# Altium PCB Nrf52Feather.PcbDoc
Units mm, origin at the board's own origin, x right, y up, seen from the top; angles counter-clockwise.
Board outline 23.03 x 50.97 mm, 2 copper layers (Top Layer, Bottom Layer); 42 components, 42 nets, 209 pads, 68 vias.
Unrouted connection lines stored in the file: 3.
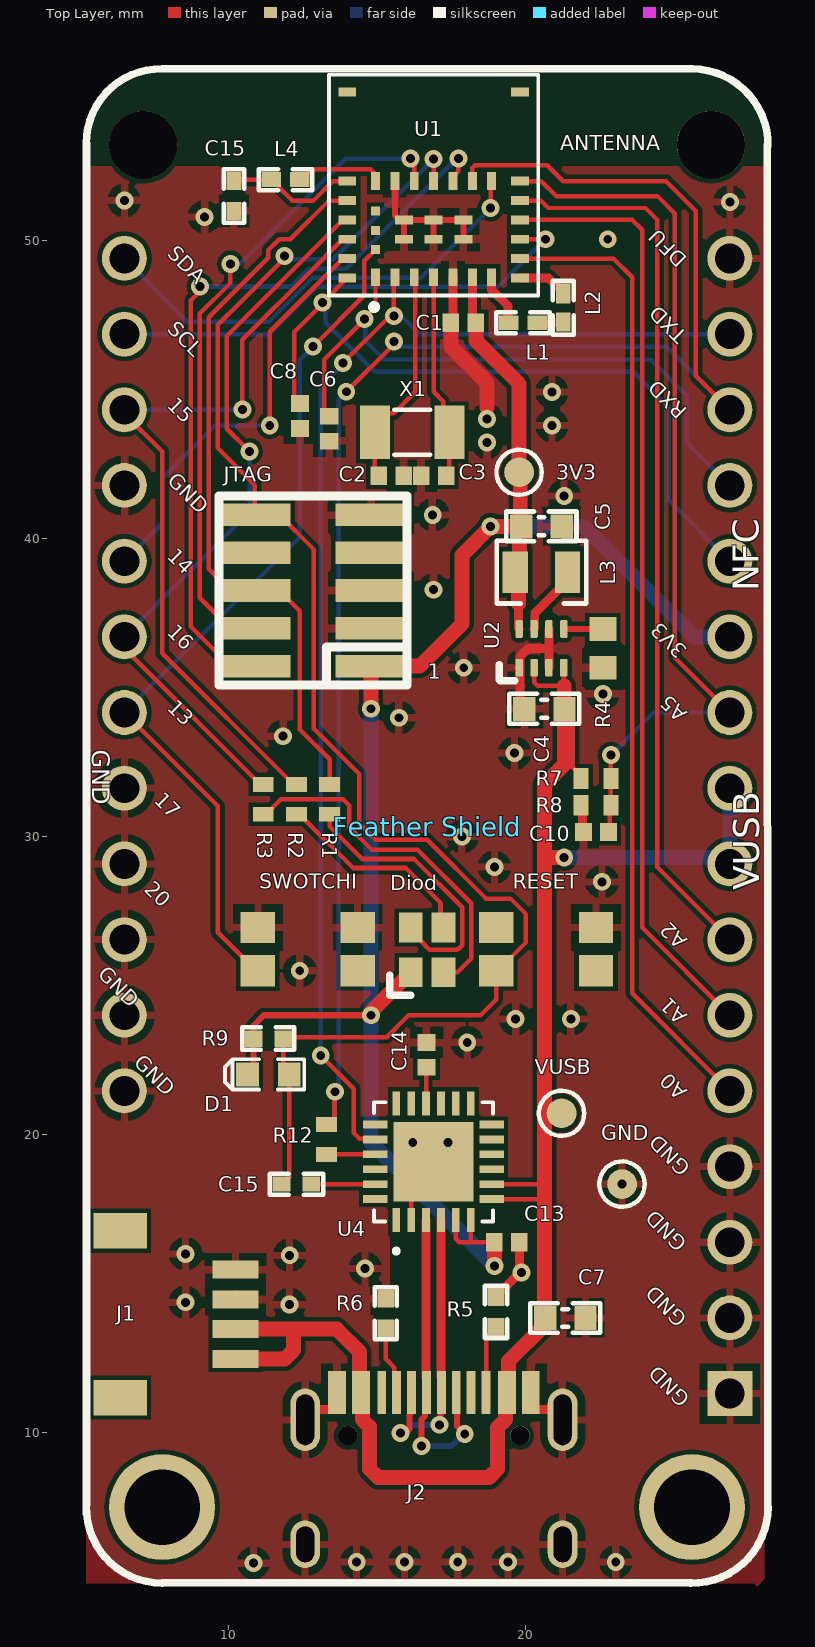
[diagram p0: Top Layer view]
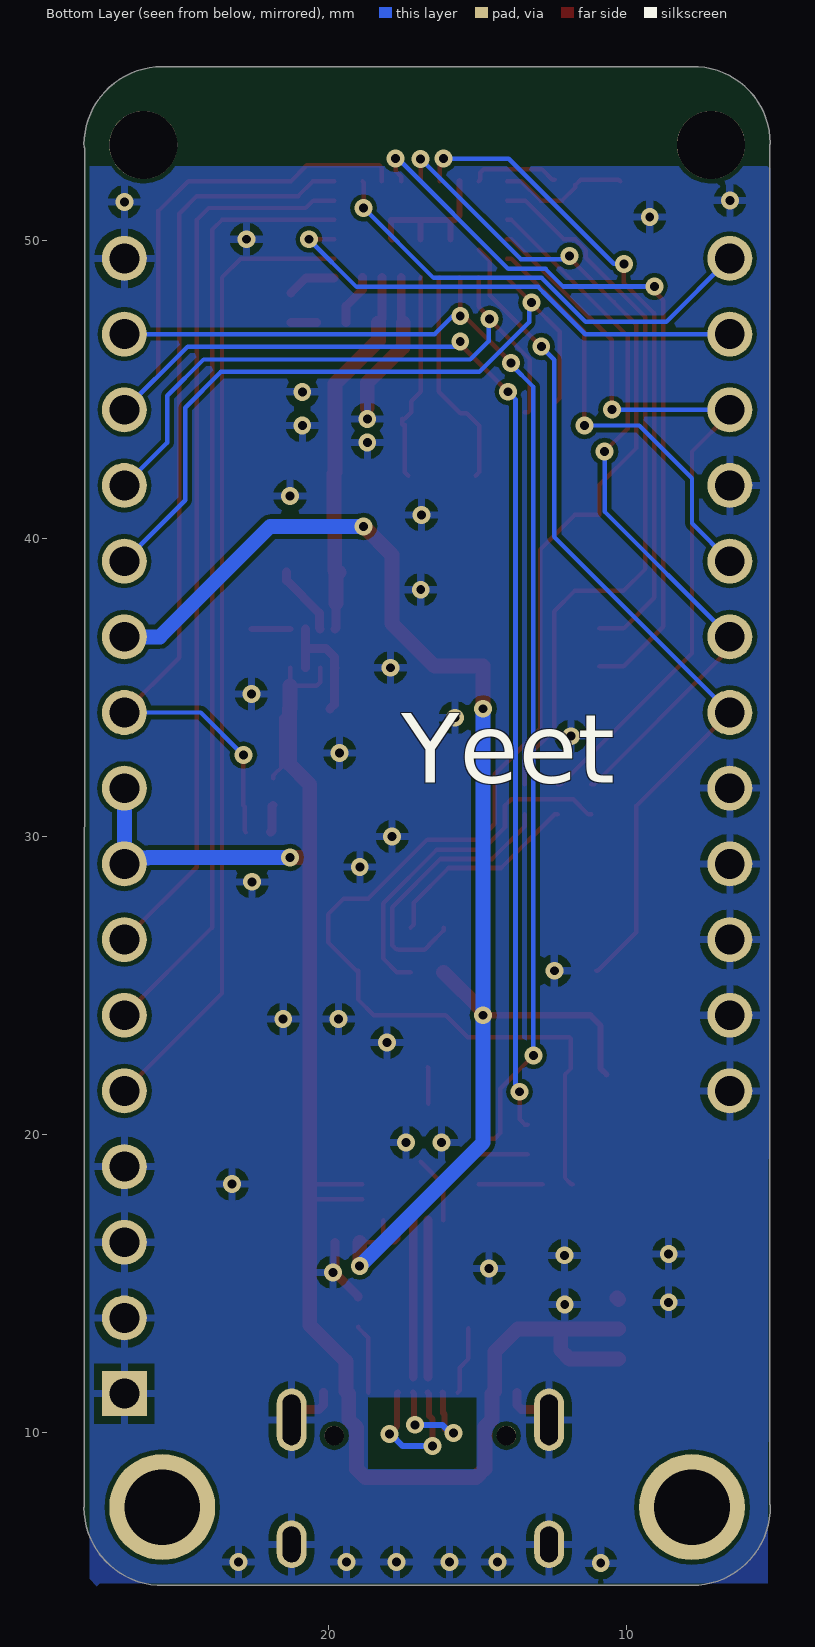
[diagram p1: Bottom Layer view, seen from below]
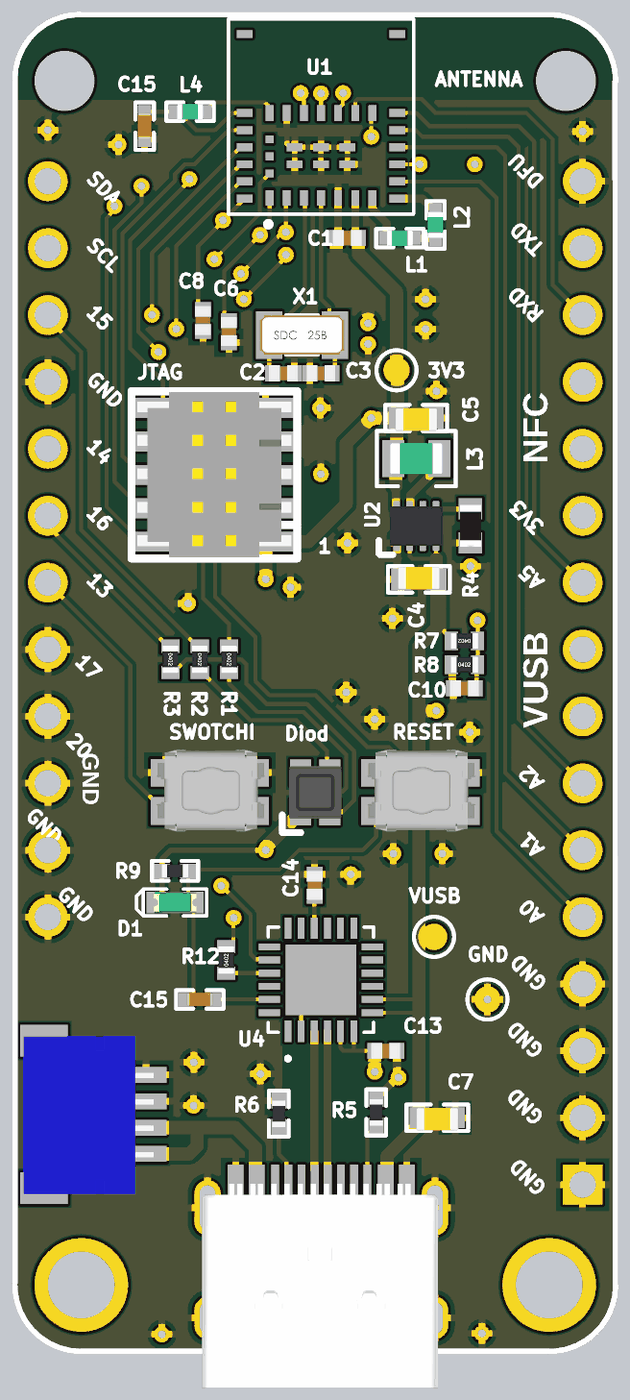
[diagram p2: 3D render of the assembled board from above, using the file's embedded part models]

## Layer stack, top to bottom
Top Solder: solder mask 0.0102, Solder Resist, Dk 3.5
Top Layer: signal copper 0.0356
Dielectric 1: dielectric 0.32, FR-4, Dk 4.8
Bottom Layer: signal copper 0.0356
Bottom Solder: solder mask 0.0102, Solder Resist, Dk 3.5

## Board outline
5.166,7.55 cw(c5.242,7.548) 5.175,7.583 5.175,53.234 cw(c5.242,53.269) 5.166,53.269 cw(c7.741,53.269) 7.793,55.844 cw(c7.791,55.768) 7.8,55.843 25.572,55.843 cw(c25.572,53.217) 28.197,53.217 cw(c25.572,53.217) 28.197,53.165 cw(c28.121,53.166) 28.175,53.114 28.189,7.533 cw(c28.122,7.497) 28.197,7.497 cw(c25.572,7.497) 25.519,4.872 cw(c25.521,4.948) 25.484,4.882 7.83,4.882 cw(c7.792,4.947) 7.792,4.872 cw(c7.792,7.497)

## Design rules (kind name [scope] priority, off if disabled: settings)
Clearance [All] p1: gap=0.15 ignorepadtopadclearanceinfootprint=TRUE
ComponentClearance [All] p1 off: gap=0.254 collisioncheckmode=3 verticalgap=0.254 showdistances=FALSE
DiffPairsRouting [InDifferentialPair('DiffPair')] p1: maxlimit=0.254 minlimit=0.089 mostfreqgap=0.2 toplayer_minwidth=0.089 toplayer_maxwidth=0.381 toplayer_prefwidth=0.15 bottomlayer_minwidth=0.089 bottomlayer_maxwidth=0.381 bottomlayer_prefwidth=0.15 maxuncoupledlength=12.7
MatchedLengths usb [All] p1: tolerance=1 checknetsindiffpair=FALSE checkdiffpairvsdiffpair=TRUE checkxsignals=TRUE checkothers=TRUE
MinimumAnnularRing [All] p1: minimumring=0.125
PolygonConnect [All] p1: connectstyle=Relief reliefconductorwidth=0.254 reliefentries=4 polygonreliefangle="90 Angle" airgapwidth=0.254
RoutingVias [All] p1: holewidth=0.3 width=0.6 viastyle="Through Hole" minholewidth=0.3 minwidth=0.6 maxholewidth=6.3 maxwidth=1.27
SolderMaskExpansion [All] p1: expansion=0.102 istentingtop=FALSE
Width [All] p1: maxlimit=1 minlimit=0.127 preferedwidth=0.2
28 further rules are at their usual default settings.

## Classes and differential pairs
differential pair DiffPair: +USB_P -USB_N

## Components (designator, comment, footprint, x,y, rotation, side; value= is the part's Value field where it differs from the comment)
3V3 "TP" TP_SMD_Ø1.0mm 19.77,42.23 r90 top
C1 "EMK107B7105KA-T" 0402#1 17.9,47.25 r180 top value=1uF
C2 "EMK107B7105KA-T" 0402#1 15.473,42.115 r0 top value=22pF
C3 "EMK107B7105KA-T" 0402#1 16.9,42.115 r180 top value=22pF
C4 "4.7uF" C0603 20.62,34.291 r0 top value=100pF
C5 "10uF" C0603 20.52,40.414 r180 top value=100pF
C6 "EMK107B7105KA-T" 0402#1 13.4,43.695 r270 top value=300pF
C7 "10uF" C0603 21.32,13.847 r180 top value=100pF
C8 "EMK107B7105KA-T" 0402#1 12.414,44.121 r270 top value=300pF
C10 "EMK107B7105KA-T" 0402#1 22.35,30.154 r180 top value=1nF
C13 "EMK107B7105KA-T" 0402#1 19.36,16.387 r0 top value=100nF
C14 "EMK107B7105KA-T" 0402#1 16.66,22.675 r90 top value=10uF
C15 "100nF" C0402 12.295,18.339 r180 top value=100pF
C15 "1pF" C0402 10.2,51.5 r90 top value=100pF
D1 "1N4148" LED_0603_G 11.355,22.02 r0 top value=L0603G
Diod "CLMVC-FKA-CLBDGL7LBB79353" SMOLLLEDCREE 17.231,26.95 r270 top locked
"Feather Shield" "2821" *XCVR_2821 16.682,30.357 r90 top locked
GND "TP" TP_SMD_Ø1.0mm 23.225,18.339 r0 top
J1 "PRT-14417" "JST 1MM" 10.255,15.473 r270 top locked
J2 "USB-C" TYPE-C-31-M-12 13.66,11.345 r0 top locked
JTAG "Pin Header 2x5, 1.27mm" HDR_2x5-SMD-1.27mm-K 12.85,38.26 r90 top locked
L1 "10nH" IND0402 19.9,47.25 r0 top value=120R/0.55A
L2 "10uH" IND0402 21.25,47.75 r90 top value=120R/0.55A
L3 "DFE201612E-2R2M=P2" IND0805R 20.52,38.876 r0 top value=2.2uH
L4 "1.1nH" IND0402 11.927,52.05 r0 top value=120R/0.55A
R1 "1K" 0402#2 13.41,31.254 r270 top value=0R
R2 "1K" 0402#2 12.295,31.254 r270 top value=0R
R3 "1K" 0402#2 11.18,31.254 r270 top value=0R
R4 "267K" RES0603R 22.58,36.32 r90 top value=0R
R5 "1K" RES0402 19,14.05 r270 top value=0R
R6 "1K" RES0402 15.294,14.001 r270 top value=0R
R7 "806K" 0402#2 22.35,31.954 r180 top value=0R
R8 "2M" 0402#2 22.35,31.054 r0 top value=0R
R9 "10K" RES0402 11.355,23.222 r180 top value=0R
R12 "1K" 0402#2 13.3,19.839 r90 top value=0R
RESET "EVP-AA002K" MINISWITCH 19,25.5 r0 top locked
SWOTCHI "EVP-AA002K" MINISWITCH 11,25.5 r0 top locked
U1 "WSM-BL241-ADA-008" *MODULE_WSM-BL241-ADA-008 16.9,51.875 r0 top locked
U2 "TPS62840DLCR" TPS62840 20.52,36.32 r90 top
U4 "CP2104" *QFN50P400X400X80-25N 16.896,19.089 r90 top
VUSB "TP" TP_SMD_Ø1.0mm 21.195,20.717 r90 top
X1 "32.768kHz" XTAL_3215 16.18,43.571 r0 top

## Footprints (in the part's own frame and the unit in brackets; to place one, negate y for a bottom-side part, rotate by r counter-clockwise, add the part's x,y. Pads: shape width x height; smd on the part's side, far side on the other; paste and mask are expansions set on the pad)
0402#1 [mil]
  rect 22x24 smd: 1(-16.5,0) 2(16.5,0)
  body extent -22,-12 22,12, height 22
0402#2 [mil]
  rect 19.68x27.56 smd: 1(-19.68,0) 2(19.69,0)
  body extent -20,-12 20,12, height 13
*MODULE_WSM-BL241-ADA-008 [mm]
  rect 0.3x0.6 smd: 1(-1.95,-3.1) 2(-1.3,-3.1) 3(-0.65,-3.1) 4(0,-3.1) 5(0.65,-3.1) 6(1.3,-3.1) 7(1.95,-3.1) 14(1.95,0.125) 15(1.3,0.125) 16(0.65,0.125) 17(0,0.125) 18(-0.65,0.125) 19(-1.3,0.125) 20(-1.95,0.125)
  rect 0.6x0.3 smd: 8(2.9,-3.125) 9(2.9,-2.475) 10(2.9,-1.825) 11(2.9,-1.175) 12(2.9,-0.525) 13(2.9,0.125) 21(-2.9,0.125) 22(-2.9,-0.525) 23(-2.9,-1.175) 24(-2.9,-1.825) 25(-2.9,-2.475) 26(-2.9,-3.125) 30(-1,-1.175) 31(0,-1.175) 32(1,-1.175) 33(-1,-1.825) 34(0,-1.825) 35(1,-1.825) 36(-2.9,3.125) 37(2.9,3.125)
  rect 0.3x0.3 smd: 27(-1.95,-0.875) 28(-1.95,-1.525) 29(-1.95,-2.175)
  silkscreen extent -3.51,-4.2 3.51,3.7, body extent -3.51,-3.71 3.51,3.68, height 0.76
*QFN50P400X400X80-25N [mm]
  rect 0.81x0.26 smd: 1(-1.955,1.25) 2(-1.955,0.75) 3(-1.955,0.25) 4(-1.955,-0.25) 5(-1.955,-0.75) 6(-1.955,-1.25) 13(1.955,-1.25) 14(1.955,-0.75) 15(1.955,-0.25) 16(1.955,0.25) 17(1.955,0.75) 18(1.955,1.25)
  rect 0.26x0.81 smd: 7(-1.25,-1.955) 8(-0.75,-1.955) 9(-0.25,-1.955) 10(0.25,-1.955) 11(0.75,-1.955) 12(1.25,-1.955) 19(1.25,1.955) 20(0.75,1.955) 21(0.25,1.955) 22(-0.25,1.955) 23(-0.75,1.955) 24(-1.25,1.955)
  rect 2.68x2.68 smd: 25(0,0)
  silkscreen extent -3.07,-2 2,2, body extent -2,-2 2,2, height 0.25
*XCVR_2821 [mm]
  rect 1.508x1.508 hole 1: 1(-19.05,-10.16)
  round 1.508 hole 1: 2(-16.51,-10.16) 3(-13.97,-10.16) 4(-11.43,-10.16) 5(-8.89,-10.16) 6(-6.35,-10.16) 7(-3.81,-10.16) 8(-1.27,-10.16) 9(1.27,-10.16) 10(3.81,-10.16) 11(6.35,-10.16) 12(8.89,-10.16) 13(11.43,-10.16) 14(13.97,-10.16) 15(16.51,-10.16) 16(19.05,-10.16) 17(-8.89,10.16) 18(-6.35,10.16) 19(-3.81,10.16) 20(-1.27,10.16) 21(1.27,10.16) 22(3.81,10.16) 23(6.35,10.16) 24(8.89,10.16) 25(11.43,10.16) 26(13.97,10.16) 27(16.51,10.16) 28(19.05,10.16)
  round 2.286 hole 2.286 unplated: None(22.86,-9.525) None(22.86,9.525)
  round 3.556 hole 2.54: S1(-22.86,-8.89) S2(-22.86,8.89)
C0402 [mm]
  rect 0.6x0.5 smd: 1(-0.5,0) 2(0.5,0)
  silkscreen extent -0.9,-0.35 0.9,0.35, body extent -0.51,-0.25 0.51,0.25, height 0.5
C0603 [mm]
  rect 0.75x0.8 smd: 1(-0.675,0) 2(0.675,0)
  silkscreen extent -1.17,-0.5 1.17,0.5, body extent -0.8,-0.38 0.8,0.48, height 0.8
HDR_2x5-SMD-1.27mm-K [mm]
  rect 0.76x2.4 smd: 1(-2.54,-1.95) 2(-2.54,1.95) 3(-1.27,-1.95) 4(-1.27,1.95) 5(0,-1.95) 6(0,1.95) 7(1.27,-1.95) 8(1.27,1.95) 9(2.54,-1.95) 10(2.54,1.95)
  silkscreen extent -3.18,-3.15 3.18,3.15, body extent -3.14,-2.92 3.14,2.92, height 6.11
IND0402 [mm]
  rect 0.65x0.5 smd: 1(-0.475,0) 2(0.475,0)
  silkscreen extent -0.9,-0.35 0.9,0.35, body extent -0.5,-0.3 0.5,0.3, height 0.5
IND0805R [mm] "Inductor 0805 reflow soldering"
  rect 0.85x1.4 smd: 1(-0.875,0) 2(0.875,0)
  silkscreen extent -1.5,-1.05 1.5,1.05, body extent -1,-0.59 1,0.6, height 0.99
"JST 1MM" [mm]
  rect 0.6x1.55 smd: 1(3,0) 2(2,0) 3(1,0) 4(0,0)
  rect 1.2x1.8 smd: 5(-1.3,-3.875) 5(4.3,-3.875)
  body extent -1.48,-4.66 4.52,0.29, height 2.96
LED_0603_G [mil]
  rect 30x32 smd: 1(-27.5,0) 2(27.5,0)
  silkscreen extent -58,-20 48,20, body extent -32,-16 32,16, height 24
MINISWITCH [mm]
  rect 1.15x1.05 smd: 1(0,1.45) 1(3.35,1.45) 2(0,0) 2(3.35,0)
  body extent -0.43,-0.78 3.87,2.33, height 1.7
RES0402 [mm]
  rect 0.6x0.55 smd: 1(-0.5,0) 2(0.5,0)
  silkscreen extent -0.87,-0.38 0.88,0.38, body extent -0.5,-0.25 0.5,0.25, height 0.3
RES0603R [mm] "resistor 0603 reflow soldering"
  rect 0.8x0.9 smd: 1(-0.65,0) 2(0.65,0)
  body extent -0.8,-0.4 0.8,0.4, height 0.45
SMOLLLEDCREE [mm] "CLMVC-FKA"
  rect 1x0.8 smd: 1(1.5,-1.1) 2(0,-1.1) 3(0,0) 4(1.5,0)
  silkscreen extent 1.6,-1.8 2.27,-1.1, body extent -0.25,-1.55 1.75,0.45, height 1
TP_SMD_Ø1.0mm [mm]
  round 1 smd paste-5: 1(0,0)
  silkscreen extent -0.76,-0.76 0.76,0.76
TPS62840 [mm]
  rrect40% 0.6x0.25 smd: 1(-0.65,0.75) 2(-0.65,0.25) 3(-0.65,-0.25) 4(-0.65,-0.75) 5(0.65,-0.75) 6(0.65,-0.25) 7(0.65,0.25) 8(0.65,0.75)
  body extent -0.75,-1 0.75,1, height 1
TYPE-C-31-M-12 [mm]
  rect 0.6x1.45 smd: 1(0,0) 1(6.5,0) 2(0.8,0) 2(5.7,0)
  rect 0.3x1.45 smd: 3(1.5,0) 4(2,0) 5(2.5,0) 6(3,0) 7(3.5,0) 8(4,0) 9(4.5,0) 10(5,0)
  oval 1x1.6 hole 1.2 slot 0.6 at 0 deg: 11(-1.07,-5.095) 11(7.57,-5.095)
  oval 1x2.1 hole 1.7 slot 0.6 at 0 deg: 11(-1.07,-0.915) 11(7.57,-0.915)
  round 0.65 hole 0.65: 12(0.36,-1.445) 12(6.14,-1.445)
  body extent -1.27,-7.75 7.68,0, height 3.27
XTAL_3215 [mm]
  rect 1x1.8 smd: 1(-1.25,0) 2(1.25,0)
  silkscreen extent -0.6,-0.75 0.6,0.75, body extent -1.6,-0.75 1.6,0.75, height 0.81

## Part data
C1 C2 C3 C6 C8 C10 C13 C14: library part Cvcc_2, Manufacturer Name="Taiyo Yuden", Manufacturer Part Number=EMK107B7105KA-T, PackageReference=EMK107B7105KA-T
C4 C5 C7 C15 C15: library part CAP, "Capacitor", Published=8-Jun-2000, Publisher="Altium Limited", Revision="July-2002: Re-released for DXP Platform."
D1: "LED, Green, 0603, 570nm, Vf=1.7V, 2.24..5.6mcd, - 40 to +100°C", Manufacturer=Osram, Manufacturer Part Number="LG L29K-G2J1-24-Z", Part Number="LG L29K Smartled Green", Part number IPS=N.A., Supplier Part Number 1=475-2709-1-ND, Artikkelnr Noca=13019147, ComponentLink1Description=Datasheet, ComponentLink2Description="Supplier link", Footprint Doc=0603, HelpURL=http://www.osram-os.com/Graphics/XPic2/00077107_0.pdf, LatestRevisionDate=2017-08-21, Note="2.24..5.6 mcd, Vfmin=1.7V", Pin Count=2, Published=2014-10-28, Publisher="Nordic Semiconductor", Supplier 1=Digi-Key, Supplier 2=Mouser, Supplier Part Number 2=720-LGL29KG2J124Z
Diod: library part SmollCree, "1. common anode 2. blue 3. green 4. red", ComponentLink1Description=Mouser, ComponentLink1URL=https://no.mouser.com/ProductDetail/Cree-Inc/CLMVC-FKA-CLBDGL7LBB79353?qs=fSnNYG2PaKLnACIKsEWrKA%3D%3D
"Feather Shield": "Adafruit Feather HUZZAH with ESP8266 WiFi", Package=None, Availability=Unavailable, MF="Adafruit Industries", MP=2821, Price=None, SnapEDA_Link=https://www.snapeda.com/parts/2821/Adafruit%20Industries%20LLC/view-part/?ref=snap
J1: library part "JST 1mm", "PRT-14417, jst sh 1mm 4 pin"
JTAG: library part "Pin Header 2x5 SMD, 1.27mm, KS", "Pin Header 2x5, 1.27mm (50mil), SMD, Keying Shroud", Manufacturer=W-CON, Manufacturer Part Number=3132-10MS0BK00R1, Part number IPS=N.A., Artikkelnr Noca=55010009, ComponentLink1Description=Datasheet, ComponentLink2Description="Supplier link", Footprint Doc=HDR_2x5-SMD-1.27mm, HelpURL=\\hizz\pro\app9717\Datasheet\connectores\W-CON\3132-XXMXXBK00XX.pdf, LatestRevisionDate=2016-04-21, Part Number="Pin Header 2x5 SMD, 1.27mm, KS", Pin Count=10, Published=2016-01-22, Publisher="Nordic Semiconductor", Supplier 1=Cabcon, Supplier 2=Samtec, Supplier Part Number 1=3132-10MS0BK00R1, Supplier Part Number 2=FTSH-105-01-F-DV-K
L1 L2 L4: "Inductor", Manufacturer=Murata, Manufacturer Part Number=BLM15AG121SN1D, Part Number=FB0402-120R@100M-500mA, Part number IPS=N.A., Supplier Part Number 1=490-1005-1-ND, Artikkelnr Noca=33029317, ComponentLink1Description=Datasheet, ComponentLink2Description="Supplier link", Footprint Doc=0402, HelpURL=http://search.murata.co.jp/Ceramy/image/img/PDF/ENG/L0110S0100BLM15A_SN.pdf, LatestRevisionDate=2014-01-10, Note="Chip EMIFIL Inductor Type Chip Ferrite Bead", Pin Count=2, Published=2011-11-14, Publisher="Nordic Semiconductor", Supplier 1=Digi-Key, Supplier 2=Farnell, Supplier Part Number 2=151-5760
L3: "DFE201612E-2R2M=", Manufacturer Name=MuRata, Manufacturer Part Number=DFE201612E-2R2M=P2, PackageReference=DFE201612E-2R2M=P2
R1 R2 R3 R4 R5 R6 R7 R8 R9 R12: "Resistor, ±5%, 0.05W", Part Number=R0201-0R, Part number IPS=00000003245, Artikkelnr Noca=N.A., ComponentLink1Description=Datasheet, ComponentLink2Description="Supplier link", Footprint Doc=0201, LatestRevisionDate=2017-11-09, Note="Chip Res 5%", Pin Count=2, Published=2014-11-13, Publisher="Nordic Semiconductor"
RESET SWOTCHI: library part SwitchMini, "EVPAA002K = 1.0 N, EVPAAU02Q = 7.0 N"
U1: "Bluetooth Low Energy/NFC module 1Mbps LGA", Package="Module Murata", Availability=Unavailable, MF="Murata Electronics", MP=WSM-BL241-ADA-008, Price=None, SnapEDA_Link=https://www.snapeda.com/parts/WSM-BL241-ADA-008/Murata%20Electronics%20North%20America/view-part/?ref=snap
U2: library part TPS62840, "Ultra low IQ Step Down Converter, DLC0008A (VSON-HR-8)", Alternate Manufacturer="Texas Instruments", Operating Temperature Range="-40 to 125 C", AEC Category=Q200, AEC Qualified=N, ComponentLink1Description="Datasheet Link", ComponentLink1URL=http://www.ti.com/lit/ds/symlink/tps62840.pdf, ComponentLink2Description="Product Folder", ComponentLink2URL=http://www.ti.com/product/tps62840, ComponentLink3Description="Online Datasheet", ComponentLink3URL=http://www.ti.com/product/tps62840/datasheet, CompType=IC, Manufacturer="Texas Instruments", MountType=SMT, PackageDescription=VSON-HR-8, PackageReference=DLC0008A, PartNumber=TPS62840DLCR, SizeArea_mm2=3, SizeAreaWB_mm2=7.5, SizeX_mm=1.5, SizeY_mm=2, SizeZ_mm=1
U4: "USB to UART Bridge", Package="QFN-24 Silicon Labs", Availability=Unavailable, MF="Silicon Labs", MP=CP2104, Price=None, SnapEDA_Link=https://www.snapeda.com/parts/CP2104/Silicon%20Labs/view-part/?ref=snap
X1: "XTAL SMD 3215, 32.768kHz, 9pF, ±20ppm", Manufacturer=NDK, Manufacturer Part Number=NX3215SA-32.768K-STD-MUA-9, Part Number=XTAL_SMD3215_32.768kHz_9pF_NDK, Part number IPS=N.A., Artikkelnr Noca=22010049, ComponentLink1Description=Datasheet, ComponentLink2Description="Supplier link", Footprint Doc=XTAL_3215, LatestRevisionDate=2017-10-23, Note="XTAL SMD 32.768kHz", Pin Count=2, Published=2017-10-23, Publisher="Nordic Semiconductor"

## Via types
v1: diameter 0.6, hole 0.3, Top Layer to Bottom Layer, 68 vias

## Nets (pads, with @x,y where several pads share a name; then routed paths per layer and width w, separated by ;. In a path a pad name is that pad's centre, name@x,y a point inside that pad or via, vN(x,y) a via of type N, cw(c..) or ccw(c..) an arc to the next point about the centre after c; other vN are vias at no path point)
3V3: 3V3.1 "Feather Shield.11" C1.1 C5.2 C13.1 D1.1 Diod.1 JTAG.1 L3.1 R9.2 U1.6 U2.8 U4.5 U4.6 | length 63.7
  Top Layer w0.15: U4.5 17.646,16.505 17.763,16.387 18.146,16.387 ; U4.6 18.146,16.387 ; C13.1 18.146,16.387
  Top Layer w0.203: D1.1 10.855,22.218 R9.2 10.855,23.66 11.203,24.007 v1(14.8,24.007)
  Top Layer w0.3: U1.6 18.2,47.369 C1.1 ; 19.745,37.826 19.745,36.995 U2.8
  Top Layer w0.5: v1(14.8,24.007) 14.8,24.119 Diod.1 ; v1(14.8,34.294) JTAG.1 14.805,35.725 16.436,35.725 17.857,37.145 17.857,39.457 v1(18.814,40.414) C5.2 ; C1.1 18.319,46.65 19.77,45.199 3V3.1 19.808,42.192 19.808,40.451 C5.2 ; C13.1 18.941,15.594 v1(18.944,15.591) ; L3.1 19.745,38.776 19.745,37.826 ; L3.1@19.72,38.876 19.783,38.939 19.783,40.351 C5.2
  Bottom Layer w0.5: v1(14.8,34.294) v1(14.8,24.007) 14.8,19.735 v1(18.944,15.591) ; v1(18.814,40.414) 21.946,40.414 25.652,36.707 26.842,36.707
A0: "Feather Shield.5" U1.9 | length 32.7
  Top Layer w0.15: U1.9 22.94,49.4 23.565,48.775 23.565,24.744 26.842,21.467
A1: "Feather Shield.6" U1.11 | length 31.8
  Top Layer w0.15: U1.11 23.565,50.7 23.9,50.365 23.9,26.949 26.842,24.007
A2: "Feather Shield.7" U1.12 | length 30
  Top Layer w0.15: U1.12 20.5,51.35 20.75,51.1 24.011,51.1 24.411,50.7 24.411,28.978 26.842,26.547
A5: "Feather Shield.10" C10.1 R7.1 R8.2 U1.13 | length 30.4
  Top Layer w0.15: U1.13 20.512,52 21.012,51.5 24.411,51.5 25,50.911 25,36.009 26.842,34.167 ; C10.1 22.809,30.195 22.809,31.014 R8.2 R7.1 v1(22.85,32.737)
  Bottom Layer w0.15: v1(22.85,32.737) 24.28,34.167 26.842,34.167
ANT: L4.2 U1.20 | length 3
  Top Layer w0.15: L4.2 12.477,52.05 12.827,52.4 14.783,52.4 14.9,52.283 14.9,52.05 U1.20
GND: "Feather Shield.1" "Feather Shield.2" "Feather Shield.3" "Feather Shield.4" "Feather Shield.16" "Feather Shield.17" "Feather Shield.18" "Feather Shield.19" "Feather Shield.20" "Feather Shield.21" "Feather Shield.25" C1.2 C2.2 C3.2 C4.1 C5.1 C6.2 C7.1 C8.2 C10.2 C13.2 C14.2 C15.1@10.2,51 GND.1 J1.3 J1.4 J2.1 J2.11 JTAG.3 JTAG.5 JTAG.9 R4.1 R5.1 R6.1 R8.1 RESET.1 SWOTCHI.1 U1.5 U1.19 U1.30 U1.31 U1.32 U1.33 U1.34 U1.35 U2.1 U2.3 U2.6 U4.2 U4.25 | length 23.5
  Top Layer w0.15: U4.2 16.146,18.339 U4.25
  Top Layer w0.203: U1.19 15.6,50.85 15.75,50.7 U1.30 ; U1.33 U1.30 ; U1.34 U1.31 ; U1.35@17.852,50.05 17.9,50.098 U1.32 U1.31 ; U1.30 U1.31
  Top Layer w0.3: J2.11@12.59,10.43 12.59,10.447 12.913,10.77 13.51,10.77 13.66,10.92 J2.1@13.66,11.345 ; C1.2 17.55,47.319 U1.5 ; R5.1 19,14.575 19.802,15.377 v1(19.845,15.377) 19.845,15.431 19.779,15.497 C13.2 ; C4.1 19.795,34.441 19.795,35.645 U2.1 19.795,35.695 19.795,36.039 20.076,36.32 20.77,36.32 ; J2.1@20.16,11.345 20.16,10.92 20.31,10.77 20.907,10.77 21.23,10.447 J2.11@21.23,10.43 ; U2.3 20.77,36.32 ; U2.6 20.77,36.32 ; R8.1 21.89,31.014 21.89,30.195 C10.2
  Top Layer w0.5: J1.3 J1.3@10.305,14.523 ; C1.2 17.481,46.438 18.689,45.23 18.689,44.4
  other v1: 10.855,5.621 14.318,5.658 15.927,5.658 17.711,5.658 19.391,5.658 23.014,5.658 12.062,14.305 8.573,14.374 14.6,15.509 12.07,15.951 8.573,15.998 23.225,18.339 16.2,19.735 17.385,19.735 18.03,23.094 19.65,23.875 21.511,23.875 12.406,25.5 22.552,28.486 18.941,28.978 17.857,30.004 19.617,32.806 11.85,33.372 15.741,33.991 22.58,34.791 17.911,35.67 16.896,38.289 16.869,40.8 21.283,41.435 18.689,43.229 20.87,43.8 18.689,44.012 20.87,44.923 22.744,50.05 9.21,50.8 26.842,51.3 6.522,51.35
NetC14_1: C14.1 U4.16 | length 1.2
  Top Layer w0.15: U4.16 16.646,22.242 C14.1
NetC15_1: C15.1@12.795,18.339 U4.23 | length 2.1
  Top Layer w0.15: C15.1@12.795,18.339 U4.23
NetC15_2: C15.2@10.2,52 L4.1 U1.21 | length 4.4
  Top Layer w0.15: C15.2@10.2,52 10.25,52.05 11.527,52.05 11.702,51.875 11.702,51.8 12.152,51.35 12.868,51.35 13.518,52 U1.21
NetDiod_2: Diod.2 R1.2 | length 9.4
  Top Layer w0.152: R1.2 13.41,30.343 14.502,29.252 16.242,29.252 17.857,27.636 17.857,26.356 17.725,26.224 17.681,26.224 17.657,26.2 16.761,26.2 16.605,26.356 16.605,26.376 16.131,26.85 Diod.2
NetDiod_3: Diod.3 R2.2 | length 6.9
  Top Layer w0.152: R2.2 12.395,30.754 14.2,28.949 15.964,28.949 17.131,27.783 17.131,27.05 Diod.3
NetDiod_4: Diod.4 R3.2 | length 12
  Top Layer w0.152: R3.2 11.28,30.754 11.78,31.254 13.86,31.254 14.068,31.047 14.068,30.317 14.83,29.554 16.367,29.554 18.159,27.762 18.159,25.909 17.7,25.45 Diod.4
NetJ2_4: J2.4 R6.2 | length 2.3
  Top Layer w0.152: R6.2 15.294,12.473 15.586,12.181 15.586,11.419 J2.4
NetJ2_10: J2.10 R5.2 | length 2.3
  Top Layer w0.152: J2.10 18.66,13.185 19,13.525 R5.2
NetL1_1: L1.1 U1.7 | length 1.8
  Top Layer w0.3: U1.7 18.85,48.361 19.4,47.811 L1.1@19.4,47.25
NetL1_2: L1.2 L2.1 | length 0.8
  Top Layer w0.3: L1.2@20.4,47.25 L2.1@21.25,47.25
NetL2_2: L2.2 U1.8 | length 1.7
  Top Layer w0.3: U1.8 20.75,48.75 L2.2@21.25,48.25
NetL3_2: L3.2 U2.7 | length 2.4
  Top Layer w0.3: U2.7 20.295,36.995 20.295,37.501 21.395,38.601 L3.2
NetR4_2: R4.2 U2.5 | length 1.3
  Top Layer w0.203: U2.5 R4.2
NetR12_1: R12.1 U4.21 | length 1.6
  Top Layer w0.15: R12.1 U4.21
NFC: "Feather Shield.12" C8.1 U1.26 | length 24.4
  Top Layer w0.15: C8.1 12.23,44.724 12.23,46.95 13.175,47.895 v1(13.175,47.925) U1.26
  Bottom Layer w0.15: v1(13.175,47.925) 13.261,47.839 13.261,47.265 14.927,45.6 23.6,45.6 24.8,44.4 24.8,41.289 26.842,39.247
NFC1: "Feather Shield.13" C6.1 U1.1 | length 21.3
  Top Layer w0.15: C6.1@13.411,44.247 13.303,44.247 13.231,44.318 13.231,46.015 v1(14.585,47.369) 14.585,47.417 14.95,47.782 U1.1
  Bottom Layer w0.15: v1(14.585,47.369) 14.612,47.341 14.612,46.634 15.232,46.015 24.185,46.015 25.4,44.8 25.4,43.229 26.842,41.787
P0.13: "Feather Shield.22" SWOTCHI.2 U1.29 | length 29.6
  Top Layer w0.152: 6.522,34.167 7.951,32.738 9.657,31.032 9.657,26.793 10.95,25.5 SWOTCHI.2@11,25.5 ; v1(12.85,46.448) 14.574,48.172 14.574,49.324 U1.29
  Bottom Layer w0.152: 6.522,34.167 12.414,40.06 12.414,46.012 v1(12.85,46.448)
P0.14: "Feather Shield.24" U1.25 | length 14.4
  Top Layer w0.15: v1(11.4,43.8) 11.4,46.95 13.243,48.793 13.85,49.4 U1.25
  Bottom Layer w0.15: 6.522,39.247 7.791,40.517 7.791,42.026 9.565,43.8 v1(11.4,43.8)
P0.15: "Feather Shield.26" R2.1 U1.24 | length 26.2
  Top Layer w0.15: 6.522,44.327 6.522,44.195 7.791,42.925 7.791,36.158 12.195,31.754 R2.1
  Top Layer w0.152: v1(10.48,44.335) 10.48,46.675 12.84,49.035 12.84,49.04 13.85,50.05 U1.24
  Bottom Layer w0.15: 6.522,44.327 6.529,44.335 v1(10.48,44.335)
P0.16: "Feather Shield.23" R3.1 U1.23 | length 24.8
  Top Layer w0.15: 6.522,36.707 6.781,36.448 6.781,36.053 11.08,31.754 R3.1 ; v1(10.725,42.925) 9.955,43.695 9.955,46.805 13.85,50.7 U1.23
  Bottom Layer w0.15: 6.522,36.707 10.725,40.911 v1(10.725,42.925)
P0.17: U1.28
P0.20: U1.27
RESET: C15.2@11.795,18.339 D1.2 JTAG.10 R9.1 RESET.2 U1.17 | length 52.6
  Top Layer w0.15: 10.408,47.93 9.655,47.177 9.655,43.045 10.9,41.8 JTAG.10 11.72,40.8 12.883,39.637 12.883,33.624 14.41,32.097 14.41,30.436 14.949,29.897 16.683,29.897 18.655,27.925 19.479,27.925 20,27.404 20,26.45 19.05,25.5 19,25.5 19,24.534 18.473,24.007 16.057,24.007 15.322,23.272 11.905,23.272 R9.1 11.855,22.218 D1.2 12.054,18.548 11.845,18.339 C15.2@11.795,18.339
  Top Layer w0.152: 10.408,47.93 11.9,49.422 v1(11.9,49.492) ; U1.17 v1(16.9,52.745)
  Bottom Layer w0.152: v1(11.9,49.492) 12.014,49.378 13.532,49.378 v1(16.9,52.745)
RX: "Feather Shield.14" R12.2 U1.15 | length 55.3
  Top Layer w0.15: U1.15 18.2,52.443 18.288,52.531 20.719,52.531 21.25,52 24.7,52 25.7,51 25.7,45.469 26.842,44.327
  Top Layer w0.152: R12.2 13.4,20.339 13.574,20.513 13.574,21.428 v1(13.585,21.44) ; v1(13.97,44.932) 15.569,46.532 v1(15.569,46.616)
  Bottom Layer w0.15: v1(15.569,46.616) 15.737,46.448 24.721,46.448 26.842,44.327
  Bottom Layer w0.152: v1(13.585,21.44) 13.585,21.561 13.715,21.691 13.715,44.678 v1(13.97,44.932)
SCL: "Feather Shield.27" U1.10 | length 16.3
  Top Layer w0.15: U1.10 v1(20.65,50.05)
  Bottom Layer w0.15: 6.522,46.867 11.375,46.867 12.65,48.142 12.958,48.45 13.392,48.45 19.05,48.45 v1(20.65,50.05)
SDA: "Feather Shield.28" U1.14 | length 15.7
  Top Layer w0.15: v1(18.814,51.1) 18.814,51.964 U1.14
  Bottom Layer w0.152: 6.522,49.407 8.654,47.275 11.357,47.275 12.833,48.751 16.465,48.751 v1(18.814,51.1)
SWDCLK: JTAG.4 U1.18 | length 22.2
  Top Layer w0.15: v1(10.08,49.223) 10.08,48.586 9.055,47.561 9.055,38.015 10.08,36.99 JTAG.4
  Top Layer w0.152: v1(16.129,52.756) 16.25,52.635 U1.18
  Bottom Layer w0.152: v1(10.08,49.223) 10.412,49.223 13.945,52.756 v1(16.129,52.756)
SWDIO: JTAG.2 U1.16 | length 25.5
  Top Layer w0.15: v1(9.055,48.465) 9.055,48.305 8.755,48.005 8.755,37.045 10.08,35.72 JTAG.2
  Top Layer w0.152: U1.16 17.55,52.15 17.727,52.327 17.727,52.744 v1(17.74,52.757)
  Bottom Layer w0.152: v1(9.055,48.465) 12.119,48.465 12.708,49.054 13.953,49.054 17.656,52.757 v1(17.74,52.757)
SWO: JTAG.6 R1.1 U1.22 | length 24.7
  Top Layer w0.15: R1.1 13.41,32.597 12.415,33.592 12.415,37.565 11.72,38.26 JTAG.6 10.08,38.26 9.355,38.985 9.355,47.435 11.354,49.434 11.354,49.689 11.715,50.05 12.09,50.05 13.39,51.35 U1.22
TX: "Feather Shield.15" U1.2 U4.20 | length 42.6
  Top Layer w0.15: v1(15.569,47.475) 15.569,48.744 U1.2
  Top Layer w0.152: v1(13.112,22.657) 14.224,21.544 14.224,20.055 14.414,19.866 14.915,19.866 U4.20 ; v1(13.86,45.9) 15.435,47.475 v1(15.569,47.475)
  Bottom Layer w0.15: v1(15.569,47.475) 15.825,47.475 16.433,46.867 26.842,46.867
  Bottom Layer w0.152: v1(13.112,22.657) 13.112,45.093 13.86,45.842 v1(13.86,45.9)
USB_N: J2.5 J2.7 U4.4 | length 9.5
  Top Layer w0.203: v1(15.792,9.992) 15.875,9.909 16.093,10.128 16.093,10.611 16.143,10.661 16.143,11.328 J2.5 ; v1(17.094,10.262) 17.127,10.295 17.127,11.312 J2.7
  Top Layer w0.3: J2.7@17.146,11.862 U4.4
  Bottom Layer w0.203: v1(15.792,9.992) 15.9,9.992 16.17,10.262 v1(17.094,10.262)
USB_P: J2.6 J2.8 U4.3 | length 10.3
  Top Layer w0.203: v1(16.496,9.546) 16.496,10.444 16.612,10.559 16.612,11.297 J2.6 ; J2.8 17.685,11.32 17.685,10.216 v1(17.945,9.956)
  Top Layer w0.3: J2.6@16.646,11.862 U4.3
  Bottom Layer w0.203: v1(16.496,9.546) 17.499,9.546 17.909,9.956 v1(17.945,9.956)
VUSB: "Feather Shield.8" "Feather Shield.9" C4.2 C7.2 J1.1 J1.2 J2.2 R7.2 U2.2 U2.4 U4.7 U4.8 VUSB.1 | length 60.8
  Top Layer w0.15: U4.7 20.62,17.839 ; U4.8 20.62,18.339 ; U2.2 20.27,35.184 20.387,35.067 21.153,35.067 ; U2.4 21.27,35.067 21.27,34.316 21.283,34.303 C4.2 21.57,34.016 21.57,32.322 21.687,32.204 21.7,32.204 21.85,32.054 R7.2
  Top Layer w0.5: J1.1 11.902,12.473 12.195,12.766 12.195,13.438 12.23,13.473 ; J1.2 12.23,13.473 ; v1(21.283,29.303) 20.62,29.303 ; C4.2@21.283,34.303 21.283,35.067 ; C4.2 21.295,32.429 20.62,31.754 20.62,29.303 ; 12.23,13.473 13.652,13.473 14.41,12.715 14.41,11.395 14.51,11.295 14.51,10.435 14.745,10.2 14.745,8.785 15.038,8.492 18.757,8.492 19.05,8.785 19.05,10.175 19.31,10.435 19.31,11.295 19.41,11.395 19.41,12.396 20.62,13.606 20.62,17.839 20.62,18.339 20.62,29.303
  Bottom Layer w0.5: v1(21.283,29.303) 26.045,29.303 26.067,29.28 26.649,29.28 26.842,29.087 26.842,31.627
XL1: C2.1 U1.3 X1.1 | length 7.4
  Top Layer w0.152: C2.1 14.93,42.239 14.93,43.786 15.353,44.21 15.569,44.21 16.286,44.928 16.286,48.739 U1.3
XL2: C3.1 U1.4 X1.2 | length 6.9
  Top Layer w0.15: X1.2@17.524,43.827 X1.2@17.524,44.027
  Top Layer w0.152: U1.4 16.9,44.928 17.217,44.61 17.217,44.24 X1.2@17.43,44.027 ; C3.1 17.43,42.226 X1.2 X1.2@17.43,43.827
pads on no net: "Feather Shield.None" "Feather Shield.S1" "Feather Shield.S2" J1.5 J2.3 J2.9 J2.12 JTAG.7 JTAG.8 U1.36 U1.37 U4.1 U4.9 U4.10 U4.11 U4.12 U4.13 U4.14 U4.15 U4.17 U4.18 U4.19 U4.22 U4.24

## Polygon pours and split planes (outlines as drawn)
GND on Top Layer "GND_L01_P000" (solid, remove dead copper, pour order 0): 5.166,56 28,56 28,5.089 27.762,4.851 27.666,4.948 5.242,4.948
GND on Bottom Layer "GND_L02_P001" (solid, pour order 1): 5.166,56 28,56 28,5.089 27.762,4.851 27.666,4.948 5.242,4.948

## Other copper
Top Layer:
  pour cut-out: 5.166,56 28,56 28,52.5 5.166,52.5
  pour cut-out: 16.896,19.089 16.848,19.089 17.925,19.089 18.435,19.089 18.435,9 15.435,9 15.435,19.089
Bottom Layer:
  pour cut-out: 15.038,11.163 18.66,11.184 18.66,8.785 15.038,8.785
  pour cut-out: 5.166,56 28,56 28,52.5 5.166,52.5

## Silkscreen, mask and mechanical layers (free items; w line width, h text height)
Top Overlay:
  lines w0.254: 5.242,7.548 ccw(c7.792,7.497) 7.792,4.947 ; 5.242,53.269 cw(c7.741,53.269) 7.791,55.768 25.572,55.768 cw(c25.572,53.217) 28.121,53.166 ; 5.25,7.575 5.25,53.269 ; 7.792,4.957 25.546,4.957 ; 19.097,35.274 19.097,35.765 ; 19.142,35.229 19.626,35.229 ; 25.521,4.948 ccw(c25.572,7.497) 28.122,7.497 ; 28.1,53.218 28.113,7.497
  text "ANTENNA" at 21.154,53.044 h0.51
Bottom Overlay:
  text "Yeet" at 17.55,31.036 h4
Edge Cutout:
  lines w0.15: 5.242,7.548 ccw(c7.792,7.497) 7.792,4.947 ; 5.242,53.269 cw(c7.741,53.269) 7.791,55.768 25.572,55.768 cw(c25.572,53.217) 28.121,53.166 ; 5.25,7.575 5.25,53.269 ; 7.792,4.957 25.546,4.957 ; 25.521,4.948 ccw(c25.572,7.497) 28.122,7.497 ; 28.1,53.218 28.113,7.497

## Text inside footprints (layer, text, board x,y; h text height)
"Feather Shield": Top Overlay "NFC" at 28.104,38.231 h1.5 r90; Top Overlay "VUSB" at 28.107,28.194 h1.5 r90; Top Overlay "GND" at 5.25,32.91 h1.02 r270; Top Overlay "DFU" at 25.445,49.407 h0.51 r135; Top Overlay "TXD" at 25.445,46.867 h0.51 r135; Top Overlay "RXD" at 25.445,44.327 h0.51 r135; Top Overlay "3V3" at 25.445,36.284 h0.51 r135; Top Overlay "A5" at 25.445,34.167 h0.51 r135; Top Overlay "GND" at 25.445,13.847 h0.51 r135; Top Overlay "GND" at 25.445,16.387 h0.51 r135; Top Overlay "A2" at 25.445,26.547 h0.51 r135; Top Overlay "A1" at 25.445,24.007 h0.51 r135; Top Overlay "A0" at 25.445,21.467 h0.51 r135; Top Overlay "GND" at 25.572,18.927 h0.51 r135; Top Overlay "GND" at 25.546,11.173 h0.51 r135; Top Overlay "SDA" at 7.919,49.534 h0.51 r315; Top Overlay "SCL" at 7.919,46.994 h0.51 r315; Top Overlay "15" at 7.919,44.454 h0.51 r315; Top Overlay "GND" at 7.919,41.914 h0.51 r315; Top Overlay "14" at 7.919,39.374 h0.51 r315; Top Overlay "16" at 7.919,36.834 h0.51 r315; Top Overlay "13" at 7.919,34.294 h0.51 r315; Top Overlay "17" at 7.493,31.191 h0.51 r315; Top Overlay "20" at 7.157,28.194 h0.51 r315; Top Overlay "GND" at 5.603,25.35 h0.51 r315; Top Overlay "GND" at 6.8,22.375 h0.51 r315
JTAG: Top Overlay "1" at 16.708,35.304 h0.51